# EAGLE board usb_hub_asic_old (EAGLE 9.6.2)
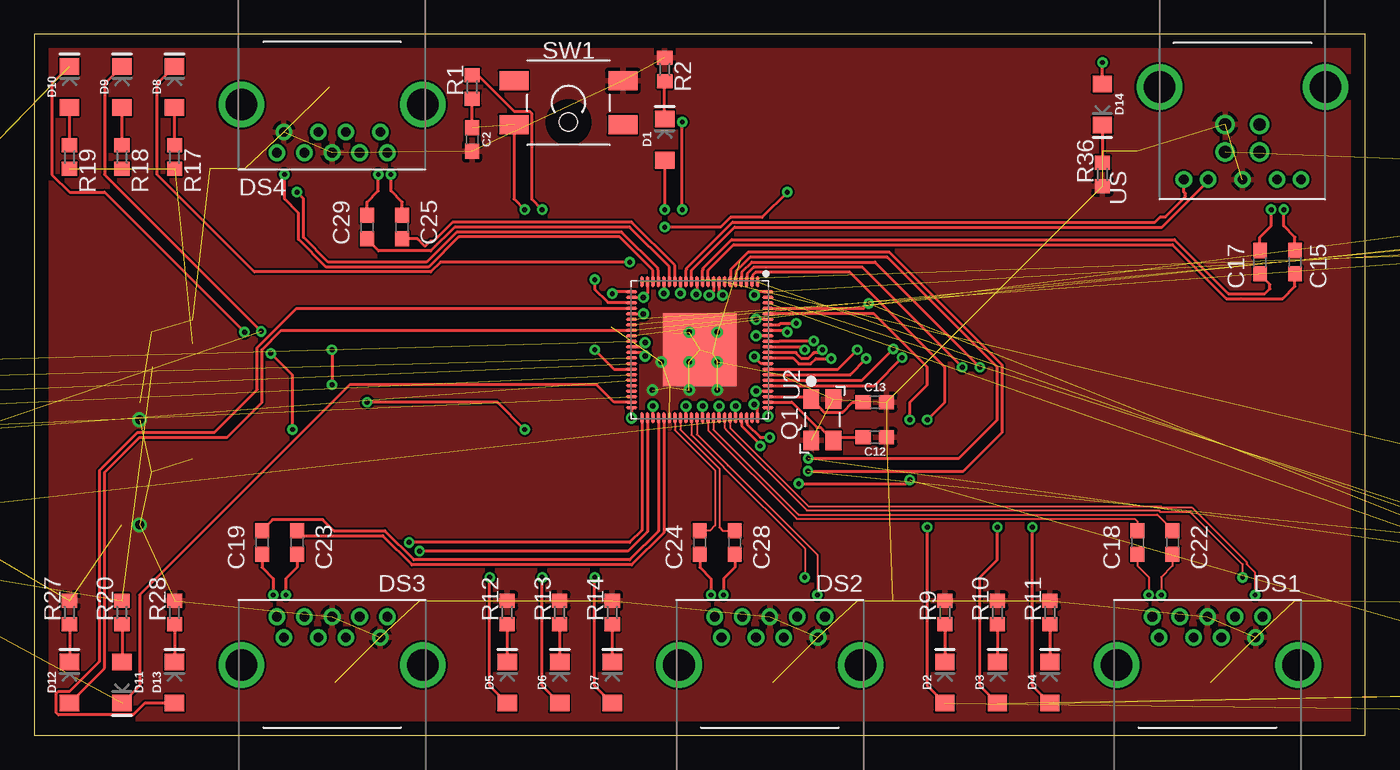
[diagram p0: board, top side]
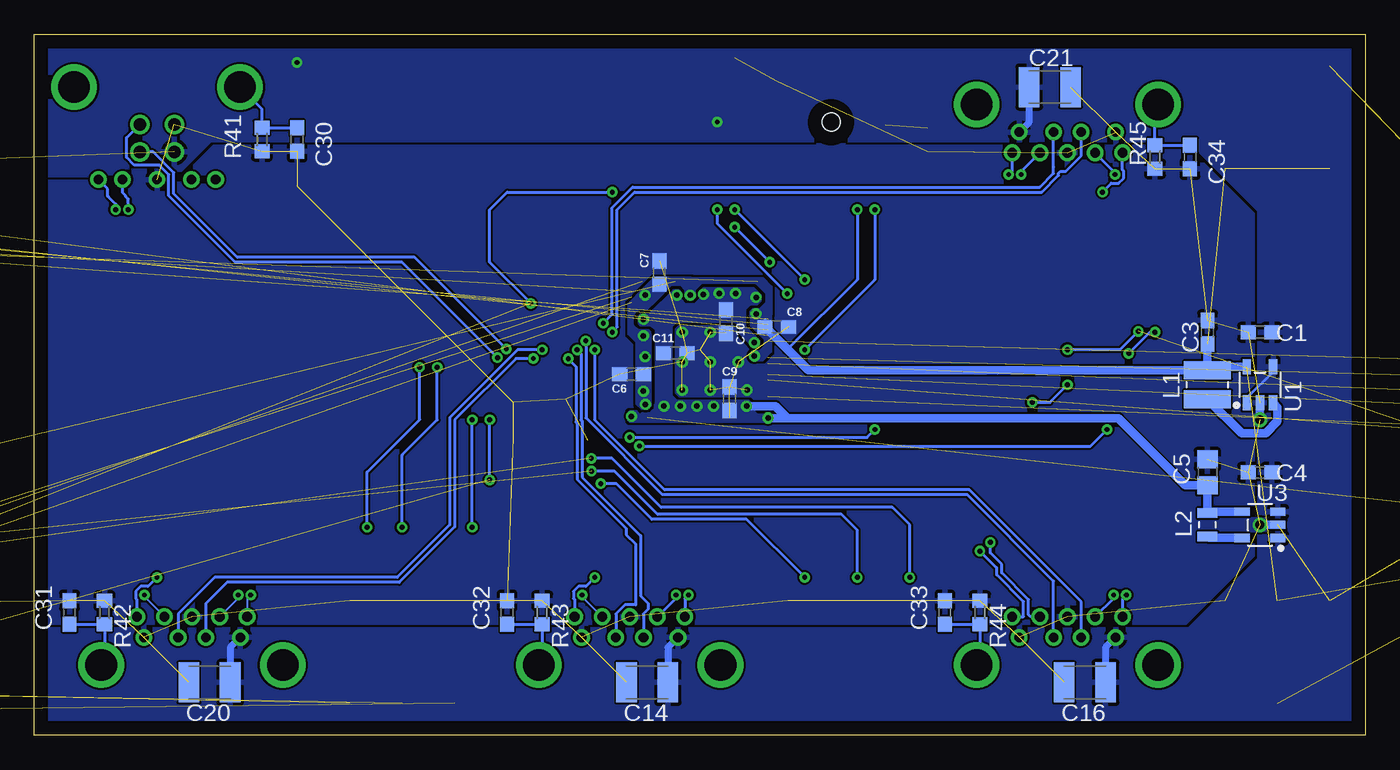
[diagram p1: board, bottom side, seen from below]

Size 96.52 x 50.8 mm. Coordinates in mm from the lower left corner, seen from the top.
Outline: 0,0 96.52,0 96.52,50.8 0,50.8 0,0
Copper layers (1*16): Top 0.035mm / dielectric 1.5mm / Bottom 0.035mm
Design rules "default": minimum track width 6mil, minimum drill 0.35mm, track to track 6mil, track to pad 6mil, pad to pad 6mil, via to via 6mil, smd to smd 6mil, copper to edge 40mil, drill to drill 6mil, minimum pad ring 10mil, minimum via ring 8mil, stop-mask expansion 4mil, vias tented up to drill 0mil, thermal gap 10mil

## Footprints (pad centres in the part's own frame; a part is rotated, then mirrored left to right if it is on the bottom)
C0603 = smd 1.1 x 1: 1 -0.85,0; 2 0.85,0
C0805 = smd 1.3 x 1.5: 1 -0.95,0; 2 0.95,0
C1210K = smd 1.5 x 2.9: 1 -1.5,0; 2 1.5,0
LED-1206 = smd 1.2 x 1.4: A -1.5,0; C 1.5,0
CONN_RCPT_USB3.0_UJ3-AH-4-TH = drill 0.7: 1 -3.5,2; 2 -1,2; 3 1,2; 4 3.5,2; 5 4,3.5; 6 2,3.5; 7 0,3.5; 8 -2,3.5; 9 -4,3.5 | drill 2.3: SHIELD1 6.585,0; SHIELD2 -6.585,0
SMD-1212(3030METRIC) = smd 1.3 x 3.4: P$1 -1.05,0; P$2 1.05,0
SMD-0805(2012METRIC) = smd 0.7 x 1.45: P$1 -0.85,0; P$2 0.85,0
4-SMD-ECS-260-13-42-CKM-TR = smd 1.4 x 1.15: P$1 -1.5,-0.8; P$2 1.5,-0.8; P$3 1.5,0.8; P$4 -1.5,0.8
R0603 = smd 1 x 1.1: 1 -0.85,0; 2 0.85,0
SMD-TLSMDT3C020GLFS = smd 2.1 x 1.4: A -3.95,-1.6; B 3.95,-1.6; C -3.95,1.6; D 3.95,1.6 | hole 1.3: 0,1.4
5-TSOT23 = smd 0.6 x 1.1: 1 -0.95,-1.3; 2 0,-1.3; 3 0.95,-1.3; 4 0.95,1.3; 5 -0.95,1.3
88-QFN_10X10X1_5.3_TPAD = smd 0.837 x 0.22: 1 -4.937,4.2; 2 -4.937,3.8; 3 -4.937,3.4; 4 -4.937,3; 5 -4.937,2.6; 6 -4.937,2.2; 7 -4.937,1.8; 8 -4.937,1.4; 9 -4.937,1; 10 -4.937,0.6; 11 -4.937,0.2; 12 -4.937,-0.2; 13 -4.937,-0.6; 14 -4.937,-1; 15 -4.937,-1.4; 16 -4.937,-1.8; 17 -4.937,-2.2; 18 -4.937,-2.6; 19 -4.937,-3; 20 -4.937,-3.4; 21 -4.937,-3.8; 22 -4.937,-4.2; 45 4.937,-4.2; 46 4.937,-3.8; 47 4.937,-3.4; 48 4.937,-3; 49 4.937,-2.6; 50 4.937,-2.2; 51 4.937,-1.8; 52 4.937,-1.4; 53 4.937,-1; 54 4.937,-0.6; 55 4.937,-0.2; 56 4.937,0.2; 57 4.937,0.6; 58 4.937,1; 59 4.937,1.4; 60 4.937,1.8; 61 4.937,2.2; 62 4.937,2.6; 63 4.937,3; 64 4.937,3.4; 65 4.937,3.8; 66 4.937,4.2 | smd 0.22 x 0.837: 23 -4.2,-4.937; 24 -3.8,-4.937; 25 -3.4,-4.937; 26 -3,-4.937; 27 -2.6,-4.937; 28 -2.2,-4.937; 29 -1.8,-4.937; 30 -1.4,-4.937; 31 -1,-4.937; 32 -0.6,-4.937; 33 -0.2,-4.937; 34 0.2,-4.937; 35 0.6,-4.937; 36 1,-4.937; 37 1.4,-4.937; 38 1.8,-4.937; 39 2.2,-4.937; 40 2.6,-4.937; 41 3,-4.937; 42 3.4,-4.937; 43 3.8,-4.937; 44 4.2,-4.937; 67 4.2,4.937; 68 3.8,4.937; 69 3.4,4.937; 70 3,4.937; 71 2.6,4.937; 72 2.2,4.937; 73 1.8,4.937; 74 1.4,4.937; 75 1,4.937; 76 0.6,4.937; 77 0.2,4.937; 78 -0.2,4.937; 79 -0.6,4.937; 80 -1,4.937; 81 -1.4,4.937; 82 -1.8,4.937; 83 -2.2,4.937; 84 -2.6,4.937; 85 -3,4.937; 86 -3.4,4.937; 87 -3.8,4.937; 88 -4.2,4.937 | smd 5.3 x 5.3: 89 0,0
CONN_RCPT_USB3.0_E8199-030-03 = drill 0.9: 1 1.25,4.71; 2 -1.25,4.71; 3 -1.25,2.71; 4 1.25,2.713 | drill 0.7: 5 -4.25,6.71; 6 -2.5,6.71; 7 0,6.71; 8 2.5,6.71; 9 4.25,6.71 | drill 2.3: SHIELD1 6.02,0; SHIELD2 -6.02,0

## Placement (x,y rotation side)
C1  4.7u  [C0603]  7.62,29.21 180 bottom
C2  1.5u  [C0603]  31.75,43.18 270 top
C3  4.7u  [C0603]  11.43,29.21 90 bottom
C4  4.7u  [C0603]  7.62,19.05 180 bottom
C5  10u  [C0805]  11.43,19.05 90 bottom
C6  22u  [C0603]  53.21,26.16 180 bottom
C7  22u  [C0603]  51.18,33.53 90 bottom
C8  22u  [C0603]  42.67,29.59 0 bottom
C9  22u  [C0603]  46.1,24.38 90 bottom
C10  22u  [C0603]  46.35,29.97 270 bottom
C11  22u  [C0603]  50.04,27.69 0 bottom
C12  10p  [C0603]  60.96,21.59 0 top
C13  10p  [C0603]  60.96,24.13 0 top
C14  150u  [C1210K]  52.07,3.81 180 bottom
C15  0.1u  [C0603]  91.44,34.29 90 top
C16  150u  [C1210K]  20.32,3.81 180 bottom
C17  0.1u  [C0603]  88.9,34.29 90 top
C18  0.1u  [C0603]  80.01,13.97 270 top
C19  0.1u  [C0603]  16.51,13.97 270 top
C20  150u  [C1210K]  83.82,3.81 180 bottom
C21  150u  [C1210K]  22.86,46.99 0 bottom
C22  0.1u  [C0603]  82.55,13.97 270 top
C23  0.1u  [C0603]  19.05,13.97 270 top
C24  0.1u  [C0603]  48.26,13.97 270 top
C25  0.1u  [C0603]  26.67,36.83 90 top
C28  0.1u  [C0603]  50.8,13.97 270 top
C29  0.1u  [C0603]  24.13,36.83 90 top
C30  0.1u  [C0603]  77.47,43.18 270 bottom
C31  0.1u  [C0603]  93.98,8.89 90 bottom
C32  0.1u  [C0603]  62.23,8.89 90 bottom
C33  0.1u  [C0603]  30.48,8.89 90 bottom
C34  0.1u  [C0603]  12.7,41.91 270 bottom
D1  SUSPEND  [LED-1206]  45.72,43.18 90 top
D2  DS1_AMB  [LED-1206]  66.04,3.81 90 top
D3  DS1_GRN  [LED-1206]  69.85,3.81 90 top
D4  DS1_BLU  [LED-1206]  73.66,3.81 90 top
D5  DS2_AMB  [LED-1206]  34.29,3.81 90 top
D6  DS2_GRN  [LED-1206]  38.1,3.81 90 top
D7  DS2_BLU  [LED-1206]  41.91,3.81 90 top
D8  DS3_AMB  [LED-1206]  10.16,46.99 90 top
D9  DS3_GRN  [LED-1206]  6.35,46.99 90 top
D10  DS3_BLU  [LED-1206]  2.54,46.99 90 top
D11  DS4_GRN  [LED-1206]  6.35,3.81 270 top
D12  DS4_AMB  [LED-1206]  2.54,3.81 90 top
D13  DS4_BLU  [LED-1206]  10.16,3.81 90 top
D14  PWR  [LED-1206]  77.47,45.72 270 top
DS1  CONN_RCPT_USB3.0_TYPEA_9POS_R/A  [CONN_RCPT_USB3.0_UJ3-AH-4-TH]  85.09,5.08 0 top
DS2  CONN_RCPT_USB3.0_TYPEA_9POS_R/A  [CONN_RCPT_USB3.0_UJ3-AH-4-TH]  53.34,5.08 0 top
DS3  CONN_RCPT_USB3.0_TYPEA_9POS_R/A  [CONN_RCPT_USB3.0_UJ3-AH-4-TH]  21.59,5.08 0 top
DS4  CONN_RCPT_USB3.0_TYPEA_9POS_R/A  [CONN_RCPT_USB3.0_UJ3-AH-4-TH]  21.59,45.72 180 top
L1  4.7u  [SMD-1212(3030METRIC)]  11.43,25.4 90 bottom
L2  2.2u  [SMD-0805(2012METRIC)]  11.43,15.24 90 bottom
Q1  26M  [4-SMD-ECS-260-13-42-CKM-TR]  57.15,22.86 270 top
R1  10k  [R0603]  31.75,46.99 90 top
R2  330  [R0603]  45.72,48.26 270 top
R3  10k  [R0603]  153.67,1.27 0 top  (outside the outline)
R4  10k  [R0603]  156.21,3.81 0 top  (outside the outline)
R5  10k  [R0603]  151.13,3.81 0 top  (outside the outline)
R6  10k  [R0603]  153.67,6.35 0 top  (outside the outline)
R7  10k  [R0603]  156.21,8.89 0 top  (outside the outline)
R8  10k  [R0603]  151.13,-6.35 0 top  (outside the outline)
R9  1k  [R0603]  66.04,8.89 90 top
R10  1k  [R0603]  69.85,8.89 90 top
R11  1k  [R0603]  73.66,8.89 90 top
R12  1k  [R0603]  34.29,8.89 90 top
R13  1k  [R0603]  38.1,8.89 90 top
R14  1k  [R0603]  41.91,8.89 90 top
R15  200±1%  [R0603]  -25.4,26.67 0 top  (outside the outline)
R16  6.04k±1%  [R0603]  151.13,8.89 180 top  (outside the outline)
R17  1k  [R0603]  10.16,41.91 270 top
R18  1k  [R0603]  6.35,41.91 270 top
R19  1k  [R0603]  2.54,41.91 270 top
R20  1k  [R0603]  6.35,8.89 90 top
R21  10k  [R0603]  -29.21,20.32 180 top  (outside the outline)
R22  10k  [R0603]  156.21,-6.35 0 top  (outside the outline)
R23  10k  [R0603]  -25.4,15.24 180 top  (outside the outline)
R24  10k  [R0603]  -29.21,16.51 180 top  (outside the outline)
R25  10k  [R0603]  -25.4,19.05 180 top  (outside the outline)
R26  10k  [R0603]  151.13,40.64 0 top  (outside the outline)
R27  1k  [R0603]  2.54,8.89 90 top
R28  1k  [R0603]  10.16,8.89 90 top
R29  10k  [R0603]  153.67,38.1 0 top  (outside the outline)
R30  10k  [R0603]  156.21,40.64 0 top  (outside the outline)
R31  10k  [R0603]  153.67,43.18 0 top  (outside the outline)
R32  10k  [R0603]  -29.21,22.86 180 top  (outside the outline)
R33  10k  [R0603]  153.67,-3.81 0 top  (outside the outline)
R34  10k  [R0603]  156.21,-1.27 0 top  (outside the outline)
R35  10k  [R0603]  -29.21,25.4 180 top  (outside the outline)
R36  330  [R0603]  77.47,40.64 90 top
R37  10k  [R0603]  -25.4,21.59 180 top  (outside the outline)
R38  10k  [R0603]  151.13,-1.27 0 top  (outside the outline)
R39  10k  [R0603]  -29.21,13.97 180 top  (outside the outline)
R40  10k  [R0603]  -25.4,24.13 180 top  (outside the outline)
R41  1M  [R0603]  80.01,43.18 90 bottom
R42  1M  [R0603]  91.44,8.89 270 bottom
R43  1M  [R0603]  59.69,8.89 270 bottom
R44  1M  [R0603]  27.94,8.89 270 bottom
R45  1M  [R0603]  15.24,41.91 90 bottom
R46  10k  [R0603]  161.29,39.37 0 top  (outside the outline)
R47  10k  [R0603]  161.29,36.83 0 top  (outside the outline)
SW1  RESET  [SMD-TLSMDT3C020GLFS]  38.73,45.85 180 top
U1  IC_MCP1603LT-330_3.3V_500MA_BUCK_REG  [5-TSOT23]  7.62,25.4 0 bottom
U2  IC_CYUSB3314_QUAD_USB3.0_HUB  [88-QFN_10X10X1_5.3_TPAD]  48.26,27.94 270 top
U3  IC_LM3674MF-1.2/NOPB_1.2V_600MA_BUCK_REG  [5-TSOT23]  7.62,15.24 90 bottom
US  CONN_RCPT_USB3.0_TYPEB_9POS_R/A  [CONN_RCPT_USB3.0_E8199-030-03]  87.63,46.99 180 top

## Library data of the parts
C1-C25 C28-C34 = rcl; SPICEPREFIX: C
D1 D14 = SparkFun-LED
D2 D5 D8 D12 = SparkFun-LED; PROD_ID: DIO-09912
D3 D6 D9 D11 = SparkFun-LED; PROD_ID: DIO-00862
D4 D7 D10 D13 = SparkFun-LED; PROD_ID: DIO-09911
DS1-DS4 L1 L2 Q1 SW1 U1-U3 US = USB_Hub_ASIC
R1-R47 = rcl; SPICEPREFIX: R

## Nets
+1V2: C5.1 C9.1 C10.1 C11.1 L2.P$2 U2.8 U2.12 U2.15 U2.18 U2.21 U2.24 U2.33 U2.44 U2.47 U2.53 U2.56 U2.59 U2.62 U2.67 U2.83 U3.4
+3V3: C3.1 C6.1 C7.1 C8.1 L1.P$2 R1.2 R17.2 R18.2 R19.2 R20.2 R21.2 R22.2 R23.2 R24.2 R25.2 R29.2 R30.2 R37.2 R38.2 R39.2 R40.2 U1.5 U2.9 U2.27 U2.34 U2.66 U2.70 U2.75 U2.80 U2.88
+5V: C1.1 C4.1 C14.1 C16.1 C20.1 C21.1 D14.A DS1.1 DS2.1 DS3.1 DS4.1 R46.2 U1.1 U1.4 U2.23 U3.1 U3.3 US.1
D1_N: C22.2 DS1.8
D1_P: C18.2 DS1.9
D2_N: C28.2 DS2.8
D2_P: C24.2 DS2.9
D3_N: C23.2 DS3.8
D3_P: C19.2 DS3.9
D4_N: C29.2 DS4.8
D4_P: C25.2 DS4.9
DS1_AMBER/ACA_DOCK: D2.A R3.1 U2.2
DS1_D_N: DS1.2 U2.73
DS1_D_P: DS1.3 U2.74
DS1_GREEN/PORT_DISABLE[0]: D3.A R4.1 U2.3
DS1_LED_SS/PORT_DISABLE[1]: D4.A R5.1 U2.4
DS1_OVRCURR: R37.1 U2.42
DS1_PWREN/CDP_EN: R32.1 U2.38
DS1_RX_N: DS1.5 U2.60
DS1_RX_P: DS1.6 U2.61
DS1_TX_N: C22.1 U2.58
DS1_TX_P: C18.1 U2.57
DS2_AMBER/NON_REMOVABLE[0]: D5.A R6.1 U2.5
DS2_D_N: DS2.2 U2.77
DS2_D_P: DS2.3 U2.76
DS2_GREEN/NON_REMOVABLE[1]: D6.A R7.1 U2.6
DS2_LED_SS/PWR_EN_SEL: D7.A R8.1 U2.84
DS2_OVRCURR: R38.1 U2.1
DS2_PWREN/CDP_EN: R33.1 U2.86
DS2_RX_N: DS2.5 U2.54
DS2_RX_P: DS2.6 U2.55
DS2_TX_N: C28.1 U2.52
DS2_TX_P: C24.1 U2.51
DS3_AMBER/VID_SEL[2]: D8.C R22.1 U2.85
DS3_D_N: DS3.2 U2.78
DS3_D_P: DS3.3 U2.79
DS3_GREEN/VID_SEL[1]: D9.C R23.1 U2.64
DS3_LED_SS/PIN_STRAP: D10.C R24.1 U2.63
DS3_OVRCURR: R39.1 U2.65
DS3_PWREN/CDP_EN: R34.1 U2.87
DS3_RX_N: DS3.5 U2.46
DS3_RX_P: DS3.6 U2.45
DS3_TX_N: C23.1 U2.49
DS3_TX_P: C19.1 U2.48
DS4_AMBER/I2C_DEV_ID: D12.A R26.1 U2.30
DS4_D_N: DS4.2 U2.82
DS4_D_P: DS4.3 U2.81
DS4_GREEN/VID_SEL[0]: D11.C R25.1 U2.43
DS4_LED_SS: D13.A U2.26
DS4_OVRCURR: R40.1 U2.36
DS4_PWREN/CDP_EN: R35.1 U2.35
DS4_RX_N: DS4.5 U2.19
DS4_RX_P: DS4.6 U2.20
DS4_TX_N: C29.1 U2.17
DS4_TX_P: C25.1 U2.16
GND: C1.2 C2.2 C3.2 C4.2 C5.2 C6.2 C7.2 C8.2 C9.2 C10.2 C11.2 C12.2 C13.2 C14.2 C16.2 C20.2 C21.2 C30.2 C31.2 C32.2 C33.2 C34.2 DS1.4 DS1.7 DS2.4 DS2.7 DS3.4 DS3.7 DS4.4 DS4.7 Q1.P$2 Q1.P$4 R2.1 R3.2 R4.2 R5.2 R6.2 R7.2 R8.2 R9.2 R10.2 R11.2 R12.2 R13.2 R14.2 R15.1 R16.1 R26.2 R27.2 R28.2 R31.2 R32.2 R33.2 R34.2 R35.2 R36.1 R41.1 R42.1 R43.1 R44.1 R45.1 R47.2 SW1.A U1.2 U2.50 U2.89 U3.2 US.4 US.7
I2C_CLK: U2.40
I2C_DATA: U2.41
MODE_SEL[0]: R29.1 U2.28
MODE_SEL[1]: R30.1 U2.29
N$7: D1.C R2.2
N$8: D14.C R36.2
N$11: D2.C R9.1
N$15: D5.C R12.1
N$16: D3.C R10.1
N$20: D6.C R13.1
N$21: D4.C R11.1
N$23: D7.C R14.1
N$24: D10.A R19.1
N$25: D9.A R18.1
N$26: D8.A R17.1
N$27: D12.C R27.1
N$28: L2.P$1 U3.5
N$29: D13.C R28.1
N$30: L1.P$1 U1.3
N$32: D11.A R20.1
N$36: R46.1 R47.1 U2.22
N$37: C30.1 R41.2 US.SHIELD1 US.SHIELD2
N$38: C31.1 DS1.SHIELD1 DS1.SHIELD2 R42.2
N$39: C32.1 DS2.SHIELD1 DS2.SHIELD2 R43.2
N$40: C33.1 DS3.SHIELD1 DS3.SHIELD2 R44.2
N$41: C34.1 DS4.SHIELD1 DS4.SHIELD2 R45.2
PWR_SW_POL: R31.1 U2.31
RESETIN: C2.1 R1.1 SW1.D U2.37
RREF_SS: R15.2 U2.32
RREF_USB2: R16.2 U2.7
SUSPEND: D1.A U2.25
US_D_N: U2.72 US.2
US_D_P: U2.71 US.3
US_N: C15.2 US.5
US_OVRCURR: R21.1 U2.39
US_P: C17.2 US.6
US_RX_N: U2.13 US.8
US_RX_P: U2.14 US.9
US_TX_N: C15.1 U2.10
US_TX_P: C17.1 U2.11
XTL_IN: C13.1 Q1.P$1 U2.69
XTL_OUT: C12.1 Q1.P$3 U2.68

## Tracks (layer width: path | path; a pad name or v marks a point on that pad's centre or on a via)
+1V2  (via drill 0.4, 0.4 pad 0.55)
  Top 0.203: U2.67 53.2,23.13 v53.21,23.11 | U2.62 v50.86,23.85 | U2.59 v49.66,23.85 | U2.56 v48.46,23.85 | U2.53 v47.26,23.85 | U2.47 v44.86,23.85 | U2.83 v52.35,30.14 | U2.8 49.66,32.15 v49.91,31.9 | U2.12 48.06,32.03 v47.99,31.96 | U2.15 v46.86,32.03 | U2.18 v45.66,32.03 | U2.24 v44.17,31.74 44.46,32.03 U2.21 | U2.33 43.99,28.14 v44.3,28.45 | U2.44 43.32,23 v43.31,22.99
  Bottom 0.61: U3.4 11.33,16.19 L2.P$2 C5.1 13.02,18.1 17.91,22.99 41.91,22.99 | v43.31,22.99 41.91,22.99 | v44.86,23.85 42.78,23.85 41.91,22.99
  pour Bottom (no thermals): 52.7,29.84 52.58,29.72 51.44,29.72 51.18,29.97 47.12,29.97 45.85,31.24 44.07,31.24 43.81,31.5 43.81,31.88 44.32,32.38 48.01,32.38 48.26,32.13 48.26,31.62 48.64,31.24 49.28,31.24 49.66,31.62 49.66,32.13 49.78,32.26 50.16,32.26 51.94,30.48 52.58,30.48 52.7,30.35
  pour Bottom (rank 2, no thermals): 53.34,22.73 43.18,22.73 43.05,22.86 43.05,23.11 43.18,23.24 44.07,23.24 44.45,23.62 44.45,24 44.7,24.26 51.05,24.26 52.58,23.24 52.83,23.5 53.34,23.5 53.47,23.37 53.47,22.86
  pour Bottom (no thermals): 47.12,29.97 45.72,29.97 45.34,29.59 45.34,29.08 44.45,28.19 44.07,28.19 43.94,28.32 43.94,28.57 44.96,29.59 44.96,30.86 44.58,31.24 44.58,31.88 47.12,31.88 48.13,30.99
  pour Bottom (no thermals): 51.44,23.5 51.44,29.34 51.82,29.72 51.82,30.61 51.05,31.37 50.29,31.37 49.4,30.48 50.29,29.59 50.29,24.64 49.15,23.5
+3V3  (via drill 0.35, 0.4 pad 0.55)  (15 unrouted)
  Top 0.203: U2.66 52.46,23.71 v52.2,23.98 | U2.88 52.46,32.14 v52.22,31.9 | U2.9 49.26,32.21 v48.95,31.9 | U2.34 44.05,27.74 v44.3,27.49 | U2.27 v44.17,30.54 | U2.80 v52.35,28.94 | U2.70 v52.35,24.94 | U2.75 52.72,26.94 v52.22,27.43 | v36.83,38.1 36.09,38.84 36.09,45.05 35.94,45.2 34.81,45.2 32.17,47.84 R1.2
  Bottom 0.203: v36.83,38.1 36.83,33.02 41.89,27.96 | 43.52,30.14 C8.1
  Bottom 0.61: U1.5 11.18,26.7 L1.P$2 | C3.1 L1.P$2 | C8.1 41.89,27.96 40.38,26.45 L1.P$2
  pour Bottom (no thermals): 52.83,29.08 52.58,29.34 52.07,29.34 51.82,29.08 51.82,23.88 52.07,23.62 52.45,23.62 52.83,24
  pour Bottom (no thermals): 49.28,31.75 49.15,31.62 48.77,31.62 48.64,31.75 48.64,32.89 48.9,33.15 51.56,33.15 52.58,32.13 52.58,31.75 52.32,31.5 51.44,31.5 50.29,32.64 49.66,32.64 49.28,32.26
  pour Bottom (no thermals): 51.94,29.34 52.7,29.34 53.09,29.72 53.09,30.48 52.7,30.86 52.07,30.86 51.44,31.5 51.44,32.13 51.69,32.38 52.32,32.38 53.47,31.24 53.47,29.08 52.07,27.69 51.82,27.94 51.82,29.21
  pour Bottom (no thermals): 43.31,30.86 44.45,30.86 44.58,30.73 44.58,29.72 43.56,28.7 43.56,28.19 43.94,27.81 44.32,27.81 44.58,27.56 44.58,27.3 44.45,27.18 43.69,27.18 43.05,27.81 43.05,30.61
  pour Bottom (no thermals): 44.45,30.86 43.94,30.86 43.43,31.37 43.43,32 44.2,32.77 48.13,32.77 48.64,32.26 48.64,31.75 48.77,31.62 49.15,31.62 49.28,31.75 49.28,33.15 43.69,33.15 43.05,32.51 43.05,30.48 43.31,30.23 44.45,30.23 44.58,30.35 44.58,30.73
+5V  (via drill 0.35)  (1 unrouted)
  Top 0.203: D14.A v77.47,48.77 | U2.23 42.04,32.14 v41.91,32.01 | v46.99,38.1 v46.99,44.45
  Bottom 0.203: U1.4 6.67,26.35 8.57,24.45 U1.1 | v41.91,32.01 46.99,37.09 v46.99,38.1
  Bottom 0.508: DS4.1 24.36,44.45 C21.1 | DS2.1 50.57,6.35 C14.1 | DS3.1 18.82,6.35 C16.1 | DS1.1 82.32,6.35 C20.1
  pour Bottom: -1.27,50.8 -1.27,0 0,-1.27 97.79,-1.27 97.79,7.62 12.7,7.62 7.62,12.7 7.62,38.1 12.7,43.18 83.82,43.18 86.36,40.64 97.79,40.64 97.79,52.07 0,52.07
D1_N  (via drill 0.35)
  Top 0.152: C22.2 82.55,12.27 81.73,11.45 v81.73,10.16
  Bottom 0.152: DS1.8 81.73,9.94 v81.73,10.16
D1_P  (via drill 0.35)
  Top 0.152: C18.2 80.01,12.27 80.83,11.45 v80.83,10.16
  Bottom 0.152: DS1.9 81.09,9.9 v80.83,10.16
D2_N  (via drill 0.35)
  Top 0.203: C28.2 50.8,12.16 49.98,11.35 v49.98,10.16
  Bottom 0.203: DS2.8 49.98,9.94 v49.98,10.16
D2_P  (via drill 0.35)
  Top 0.203: C24.2 48.26,12.16 49.08,11.35 v49.08,10.16
  Bottom 0.203: DS2.9 49.34,9.9 v49.08,10.16
D3_N  (via drill 0.35)
  Top 0.203: C23.2 19.05,12.16 18.23,11.35 v18.23,10.16
  Bottom 0.203: DS3.8 18.23,9.94 v18.23,10.16
D3_P  (via drill 0.35)
  Top 0.203: C19.2 16.51,12.16 17.33,11.35 v17.33,10.16
  Bottom 0.203: DS3.9 17.59,9.9 v17.33,10.16
D4_N  (via drill 0.35)
  Top 0.203: C29.2 24.13,38.64 24.95,39.45 v24.95,40.64
  Bottom 0.203: DS4.8 24.95,40.86 v24.95,40.64
D4_P  (via drill 0.35)
  Top 0.203: C25.2 26.67,38.64 25.85,39.45 v25.85,40.64
  Bottom 0.203: DS4.9 25.59,40.9 v25.85,40.64
DS1_AMBER/ACA_DOCK  (via drill 0.35)  (1 unrouted)
  Top 0.203: D2.A 64.77,3.58 v64.77,15.07 | v64.77,22.86 66.04,24.13 66.04,26.67 59.16,33.55 52.31,33.55 52.1,33.34 52.1,32.91 U2.2
  Bottom 0.203: v64.77,15.07 v64.77,22.86
DS1_D_N  (via drill 0.35)
  Top 0.203: v60.33,27.3 59.17,26.14 U2.73
  Bottom 0.203: v60.33,27.3 61.6,27.3 66.04,22.86 66.04,15.09 70.06,11.07 82.55,11.07 84.09,9.53 DS1.2
DS1_D_P  (via drill 0.35)
  Top 0.203: v59.69,27.94 58.29,26.54 U2.74
  Bottom 0.203: v59.69,27.94 61.46,27.94 66.4,23.01 66.4,15.24 70.21,11.43 83.45,11.43 86.09,8.79 DS1.3
DS1_GREEN/PORT_DISABLE[0]  (via drill 0.35)  (1 unrouted)
  Top 0.203: D3.A 68.58,3.58 68.58,11.43 69.85,12.7 v69.85,15.07 | U2.3 51.7,32.91 51.7,33.44 52.16,33.91 60.07,33.91 v67.31,26.67
  Bottom 0.203: v67.31,26.67 67.31,22.86 69.85,20.32 v69.85,15.07
DS1_LED_SS/PORT_DISABLE[1]  (via drill 0.35)  (1 unrouted)
  Top 0.203: D4.A 72.39,3.58 v72.39,15.07 | U2.4 51.3,32.91 51.3,33.54 52.04,34.29 60.96,34.29 | 60.96,34.29 60.98,34.29 | v68.58,26.67 60.96,34.29
  Bottom 0.203: v72.39,15.07 72.39,19.07 68.58,22.88 v68.58,26.67
DS1_OVRCURR  (1 unrouted)
DS1_PWREN/CDP_EN  (1 unrouted)
DS1_RX_N  (via drill 0.35)
  Top 0.152: U2.60 50.06,22.28 50.16,22.18 50.16,22.15 56.02,16.28 81.57,16.28 81.65,16.2 83.82,16.2 87.63,12.39 v87.63,11.43
  Bottom 0.203: v87.63,11.43 88.27,10.79 88.28,10.79 88.8,10.79 89.17,10.42 89.17,9.9 89.09,9.82 DS1.5
DS1_RX_P  (via drill 0.35)
  Top 0.152: U2.61 50.46,22.28 56.15,16.59 81.69,16.59 81.77,16.51 83.95,16.51 87.94,12.52 87.94,12.39 88.54,11.79 v88.54,10.16
  Bottom 0.152: DS1.6 88.54,10.03 v88.54,10.16
DS1_TX_N
  Top 0.152: C22.1 82.55,14.87 81.44,15.98 55.42,15.98 49.25,22.15 49.25,22.16 49.26,22.17 U2.58
DS1_TX_P
  Top 0.152: C18.1 80.01,15.5 79.83,15.68 55.3,15.68 48.86,22.11 U2.57
DS2_AMBER/NON_REMOVABLE[0]  (via drill 0.35)  (1 unrouted)
  Top 0.203: D5.A 33.02,3.58 v33.02,11.43 | v56.13,20.07 67.06,20.07 69.85,22.86 69.85,26.67 61.87,34.65 51.9,34.65 50.9,33.65 50.9,32.91 U2.5
  Bottom 0.203: v33.02,11.43 33.02,15.24 34.29,16.51 51.05,16.51 54.61,20.07 v56.13,20.07
DS2_D_N  (via drill 0.35)
  Top 0.203: v57.16,27.93 56.97,27.74 56.51,27.74 56.51,27.68 56.14,27.31 55.62,27.31 55.25,27.68 55.25,27.74 U2.77
  Bottom 0.203: v57.16,27.93 56.88,27.65 56.88,22.85 56.79,22.77 56.79,18.69 52.55,14.45 52.55,10.09 52.02,9.56 52.02,9.12 52.34,8.79 DS2.2
DS2_D_P  (via drill 0.35)
  Top 0.203: U2.76 55.02,27.34 55.45,26.91 56.31,26.91 56.69,27.29 v57.8,27.29
  Bottom 0.203: v57.8,27.29 57.23,26.72 57.23,22.7 57.15,22.62 57.15,18.55 53.59,14.99 53.59,14.54 52.91,13.85 52.91,9.44 53.7,9.44 54.34,8.79 DS2.3
DS2_GREEN/NON_REMOVABLE[1]  (via drill 0.35)  (1 unrouted)
  Top 0.203: D6.A 36.83,3.58 v36.83,11.43 | v56.11,19.14 67.4,19.14 70.21,21.95 70.21,26.82 62.02,35 51.75,35 50.5,33.75 50.5,32.91 U2.6
  Bottom 0.203: v36.83,11.43 36.83,14.86 37.97,16 51.32,16 54.46,19.14 v56.11,19.14
DS2_LED_SS/PWR_EN_SEL  (via drill 0.35)  (1 unrouted)
  Top 0.203: D7.A 40.64,3.58 v40.64,11.43 | v55.43,18.23 63.22,18.23 v63.5,18.51 | v63.5,22.86 63.5,24.13 64.77,25.4 64.77,26.67 60.9,30.54 U2.84
  Bottom 0.203: v40.64,11.43 44.86,15.65 51.73,15.65 54.3,18.23 v55.43,18.23 | v63.5,18.51 v63.5,22.86
DS2_OVRCURR  (1 unrouted)
DS2_PWREN/CDP_EN  (1 unrouted)
DS2_RX_N  (via drill 0.35)
  Top 0.152: U2.54 47.66,21.77 49.99,19.45 49.99,19.43 55.88,13.54 v55.88,11.43
  Bottom 0.203: v55.88,11.43 56.52,10.79 56.53,10.79 57.05,10.79 57.42,10.42 57.42,9.9 57.34,9.82 DS2.5
DS2_RX_P  (via drill 0.35)
  Top 0.152: U2.55 48.06,21.8 50.29,19.57 50.29,19.56 56.79,13.06 v56.79,10.16
  Bottom 0.152: DS2.6 56.79,10.03 v56.79,10.16
DS2_TX_N
  Top 0.152: C28.1 49.92,14.82 49.68,15.05 49.68,19.32 46.85,22.15 46.85,22.16 46.86,22.17 U2.52
DS2_TX_P
  Top 0.152: C24.1 49,14.82 49.38,15.2 49.38,19.19 46.46,22.11 U2.51
DS3_AMBER/VID_SEL[2]  (via drill 0.35)  (1 unrouted)
  Top 0.203: U2.85 60.15,30.94 v60.51,31.3 | v54.61,39.37 52.78,37.54 50.49,37.54 49.78,36.83 v45.72,36.83 | v43.18,34.29 29.45,34.29 28.74,33.58 15.95,33.58 8.89,40.64 8.89,47.22 D8.C
  Bottom 0.203: v60.51,31.3 63.5,34.29 63.5,38.1 62.23,39.37 v54.61,39.37 | v45.72,36.83 v43.18,34.29
DS3_D_N  (via drill 0.35)
  Top 0.203: v55.88,27.94 55.68,28.14 U2.78
  Bottom 0.203: v55.88,27.94 55.88,22.86 50.8,17.78 28.71,17.78 20.59,9.66 DS3.2
DS3_D_P  (via drill 0.35)
  Top 0.203: U2.79 54.02,28.54 54.06,28.58 v56.52,28.58
  Bottom 0.203: v56.52,28.58 56.52,23 50.95,17.42 28.85,17.42 22.59,11.16 DS3.3
DS3_GREEN/VID_SEL[1]  (via drill 0.35)  (1 unrouted)
  Top 0.203: U2.64 51.7,22.97 51.7,22.54 52.65,21.59 v53.34,21.59 | v35.56,22.15 33.58,24.13 v24.13,24.13 | v21.59,27.94 v21.59,25.4 | D9.C 5.08,47.22 5.08,40.64 v16.45,29.27
  Bottom 0.203: v53.34,21.59 36.12,21.59 v35.56,22.15 | v24.13,24.13 22.86,24.13 v21.59,25.4 | v16.45,29.27 17.78,27.94 v21.59,27.94
DS3_LED_SS/PIN_STRAP  (via drill 0.35)  (1 unrouted)
  Top 0.203: U2.63 51.3,22.97 51.3,22.44 52.64,21.1 v52.64,20.96 | v18.72,22.15 18.72,26.1 v17.14,27.68 | D10.C 1.27,47.22 1.27,40.64 2.54,39.37 5.08,39.37 v15.24,29.21
  Bottom 0.203: v52.64,20.96 19.91,20.96 v18.72,22.15 | v15.24,29.21 15.61,29.21 v17.14,27.68
DS3_OVRCURR  (1 unrouted)
DS3_PWREN/CDP_EN  (1 unrouted)
DS3_RX_N  (via drill 0.35)
  Top 0.203: U2.46 44.46,14.75 43.05,13.33 v27.94,13.33
  Bottom 0.203: v27.94,13.33 26.74,12.13 26.73,12.13 26.71,12.12 26.71,11.61 24.77,9.67 24.77,8.6 24.79,8.58 DS3.5
DS3_RX_P  (via drill 0.35)
  Top 0.203: U2.45 44.06,14.85 43.18,13.97 v27.18,13.97
  Bottom 0.203: v27.18,13.97 27.18,13.2 26.35,12.38 26.35,11.76 24.41,9.82 24.41,8.73 24.26,8.58 DS3.6
DS3_TX_N
  Top 0.203: C23.1 19.41,14.46 25.27,14.46 27.39,12.34 43.33,12.34 45.66,14.68 U2.49
DS3_TX_P
  Top 0.203: C19.1 16.51,14.87 17.26,15.62 20.91,15.62 21.71,14.82 25.41,14.82 27.54,12.7 43.18,12.7 45.26,14.78 U2.48
DS4_AMBER/I2C_DEV_ID  (1 unrouted)
  Top 0.203: D12.A 5.08,4.85 5.08,19.05 7.62,21.59 13.97,21.59 16.51,24.13 16.51,27.94 17.91,29.34 U2.30
DS4_D_N  (via drill 0.35)
  Top 0.203: U2.82 54.02,29.74 54.14,29.86 v55.25,29.86
  Bottom 0.203: v55.25,29.86 54.61,30.5 54.61,38.25 53.13,39.73 23.59,39.73 22.59,40.73 22.59,41.17 | 22.59,41.17 DS4.2 | 22.59,41.17
DS4_D_P  (via drill 0.35)
  Top 0.203: v54.61,29.21 54.48,29.34 U2.81
  Bottom 0.203: v54.61,29.21 54.25,29.57 54.25,38.1 52.98,39.37 23.45,39.37 22.23,40.58 22.23,40.73 22.09,40.88 21.71,40.88 20.59,42.01 DS4.3
DS4_GREEN/VID_SEL[0]  (1 unrouted)
  Top 0.203: D11.C 7.62,3.58 7.62,10.16 22.87,25.41 40.78,25.41 42.05,24.14 U2.43
DS4_LED_SS
  Top 0.203: D13.A 8.01,2.31 7.16,1.46 1.74,1.46 1.59,1.6 1.59,3.02 1.74,3.16 2.54,3.16 4.72,5.35 4.72,19.2 7.47,21.95 13.06,21.95 16.15,25.04 16.15,28.09 19.01,30.94 U2.26
DS4_OVRCURR  (1 unrouted)
DS4_PWREN/CDP_EN  (1 unrouted)
DS4_RX_N  (via drill 0.35)
  Top 0.203: U2.19 45.26,33.7 45.22,33.75 45.22,33.85 42.59,36.47 30.63,36.47 28.44,34.29 21.32,34.29 19.52,36.09 19.52,38.9 v19.05,39.37
  Bottom 0.203: v19.05,39.37 18.41,40.01 18.4,40.01 17.88,40.01 17.51,40.38 17.51,40.9 17.59,40.98 DS4.5
DS4_RX_P  (via drill 0.35)
  Top 0.203: U2.20 44.86,33.7 42.44,36.12 30.77,36.12 28.59,33.93 21.17,33.93 19.16,35.94 19.16,37.85 18.14,38.87 v18.14,40.64
  Bottom 0.203: DS4.6 18.14,40.77 v18.14,40.64
DS4_TX_N
  Top 0.203: U2.17 46.06,33.95 43.18,36.83 30.48,36.83 28.75,35.1 24.96,35.1 24.13,35.93 C29.1
DS4_TX_P
  Top 0.203: U2.16 46.46,34.05 43.33,37.19 30.33,37.19 28.96,35.81 28.7,35.81 28.35,35.46 28.31,35.46 27.79,35.98 C25.1
GND  (via drill 0.4, 0.65)  (76 unrouted)
  Bottom 0.61: U1.2 v7.62,22.86 | U3.2 v7.62,15.24
  other vias: 49.53,25.02 49.53,29.21 49.53,27.05 47.5,29.21 47.5,27.05 47.5,25.02 45.47,27.05 44.83,25.02
  pour Top (no thermals): 45.59,30.48 45.59,23.5 45.85,23.24 46.23,23.24 46.48,23.5 46.48,25.02 46.74,25.27 50.8,25.27 50.93,25.4 50.93,30.48 50.8,30.61 45.72,30.61
  pour Bottom (rank 6): -3.05,59.31 -7.49,54.86 -7.49,-2.54 5.71,-15.75 117.22,-15.75 133.48,0.51 133.48,47.75 121.92,59.31
  pour Top: 5.21,63.37 -10.79,47.37 -10.79,-4.7 -1.52,-13.97 114.94,-13.97 129.54,0.64 129.54,56.01 122.17,63.37
  pour Bottom (rank 5, no thermals): 52.07,35.18 45.09,35.18 40.89,30.99 40.89,24.51 43.05,22.35 53.34,22.35 54.86,23.88 54.86,32.38
MODE_SEL[0]  (1 unrouted)
MODE_SEL[1]  (1 unrouted)
N$7
  Top 0.203: D1.C R2.2
N$8
  Top 0.203: D14.C R36.2
N$11
  Top 0.203: R9.1 D2.C
N$15
  Top 0.203: R12.1 D5.C
N$16
  Top 0.203: R10.1 D3.C
N$20
  Top 0.203: R13.1 D6.C
N$21
  Top 0.203: R11.1 D4.C
N$23
  Top 0.203: R14.1 D7.C
N$24
  Top 0.203: R19.1 D10.A
N$25
  Top 0.203: R18.1 D9.A
N$26
  Top 0.203: R17.1 D8.A
N$27
  Top 0.203: R27.1 D12.C
N$28
  Bottom 0.61: U3.5 11.33,14.29 L2.P$1
N$29
  Top 0.203: R28.1 D13.C
N$30
  Bottom 0.203: U1.3 6.84,23.93
  Bottom 0.61: U1.3 6.35,23.78 6.35,22.74 7.21,21.88 8.96,21.88 L1.P$1
N$32
  Top 0.203: R20.1 D11.A
N$36  (2 unrouted)
N$37
  Bottom 0.203: C30.1 R41.2 80.01,45.39 US.SHIELD1
N$38
  Bottom 0.203: C31.1 R42.2 91.44,5.32 DS1.SHIELD1
N$39
  Bottom 0.203: C32.1 R43.2 59.69,5.32 DS2.SHIELD1
N$40
  Bottom 0.203: C33.1 R44.2 27.94,5.32 DS3.SHIELD1
N$41
  Bottom 0.203: C34.1 R45.2 15.24,45.48 DS4.SHIELD1
PWR_SW_POL  (1 unrouted)
RESETIN  (via drill 0.35)  (1 unrouted)
  Top 0.203: C2.1 R1.1 | SW1.D 34.78,38.88 v35.56,38.1 | U2.37 42.04,26.54 v40.64,27.94
  Bottom 0.203: v35.56,38.1 35.56,33.02 v40.64,27.94
RREF_SS  (1 unrouted)
RREF_USB2  (1 unrouted)
SUSPEND  (via drill 0.35)
  Top 0.203: D1.A v45.72,38.1 | U2.25 43.29,31.38 41.59,31.38 40.64,32.33 v40.64,33.02
  Bottom 0.203: v45.72,38.1 v40.64,33.02
US_D_N  (via drill 0.35)
  Top 0.203: v62.29,28 60.03,25.74 U2.72
  Bottom 0.203: v62.29,28 68.94,34.65 81.81,34.65 86.42,39.25 86.42,40.78 87.91,42.28 US.2
US_D_P  (via drill 0.35)
  Top 0.203: v62.94,27.36 60.91,25.34 U2.71
  Bottom 0.203: v62.94,27.36 69.86,34.29 81.96,34.29 86.77,39.1 86.77,40.63 87.46,41.33 87.47,41.33 87.48,41.32 89.28,41.32 89.84,41.88 89.84,43.32 US.3
US_N  (via drill 0.35)
  Top 0.203: C15.2 91.44,36.1 90.62,36.91 v90.62,38.1
  Bottom 0.203: US.5 91.21,39.61 91.21,39.12 91.16,39.04 90.62,38.5 v90.62,38.1
US_OVRCURR  (1 unrouted)
US_P  (via drill 0.35)
  Top 0.203: C17.2 88.9,36.1 89.72,36.91 v89.72,38.1
  Bottom 0.203: US.6 90.13,39.34 89.91,39.12 89.89,39.04 89.72,38.86 v89.72,38.1
US_RX_N
  Top 0.203: U2.13 47.66,33.7 50.79,36.83 81.79,36.83 85.13,40.17 US.8
US_RX_P
  Top 0.203: U2.14 47.26,33.7 47.3,33.75 47.3,33.85 50.64,37.19 81.28,37.19 81.67,37.58 82.03,37.58 83.49,39.03 83.49,39.26 83.38,39.37 US.9
US_TX_N
  Top 0.203: U2.10 48.86,33.7 50.72,35.56 82.55,35.56 86.46,31.65 87.51,31.65 | C15.1 91.44,32.54 90.55,31.65 87.51,31.65 | 87.51,31.65
US_TX_P
  Top 0.203: U2.11 48.46,33.7 48.5,33.75 48.5,33.85 50.57,35.92 82.7,35.92 86.61,32 | C17.1 88.9,33.39 89.62,32.67 89.62,32.36 89.26,32 86.61,32 | 86.61,32
XTL_IN
  Top 0.203: U2.69 56.17,24.54 Q1.P$1 57.12,23.59 57.12,23.55 57.27,23.41 58.63,23.41 59.35,24.13 C13.1
XTL_OUT
  Top 0.203: U2.68 54.94,24.14 56.76,22.31 57.03,22.31 57.18,22.16 57.18,22.13 Q1.P$3 58.18,21.59 C12.1